# Allegro board BBB_CAPE_PCB_AN.brd
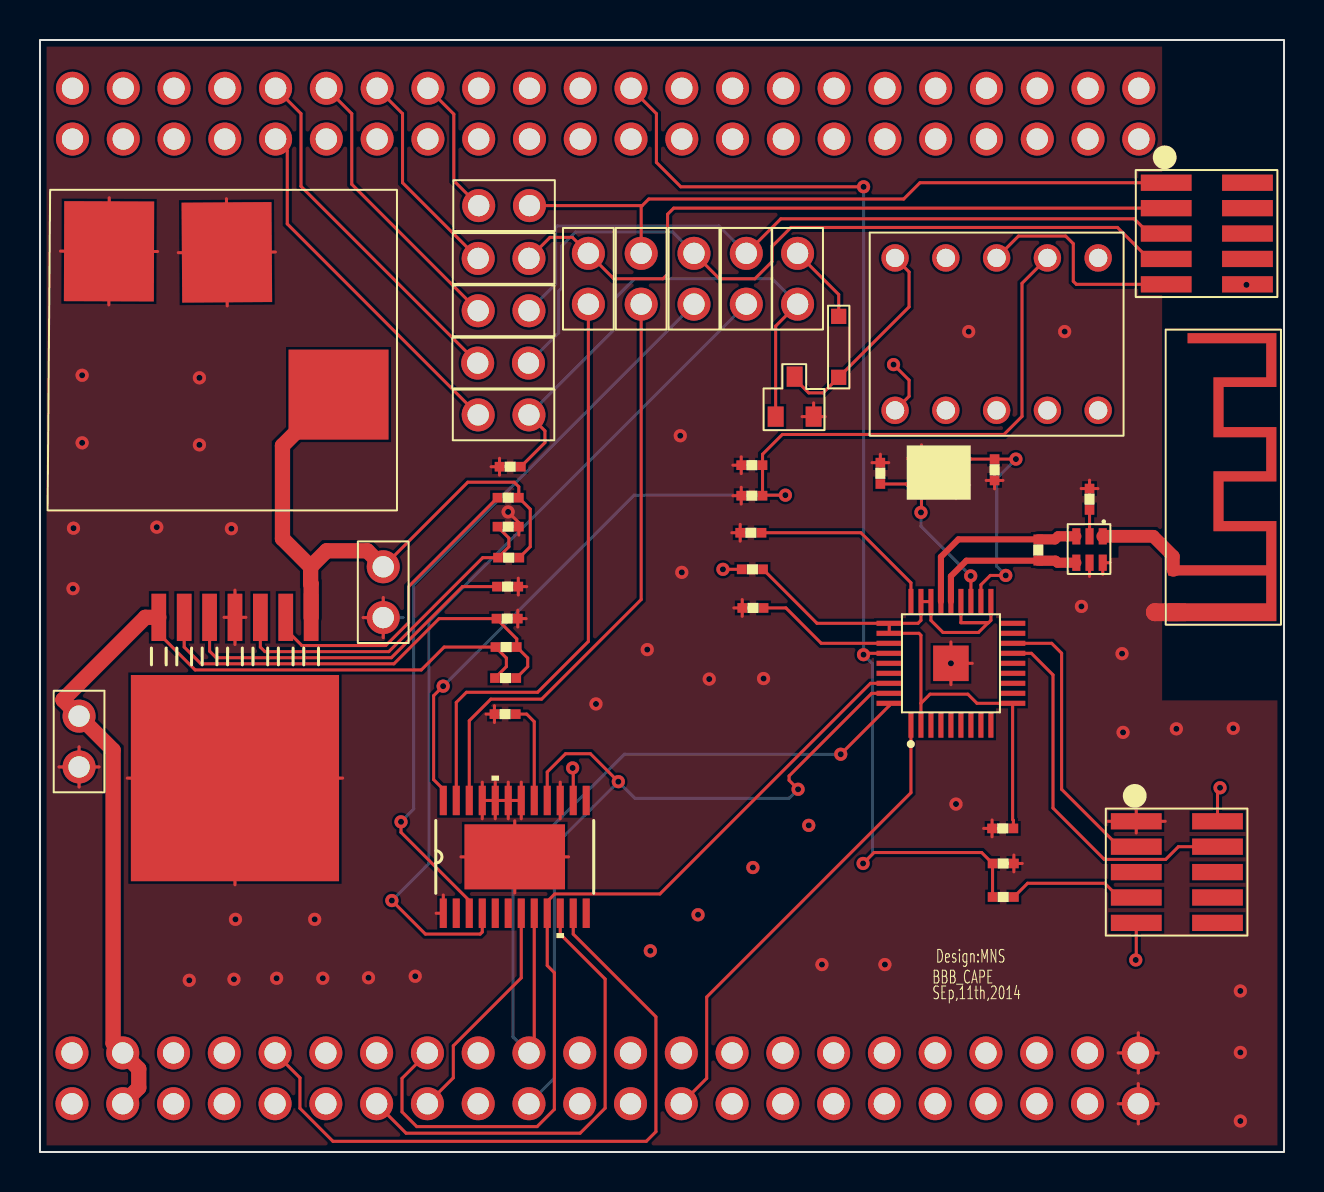
[diagram p0: board, top side]
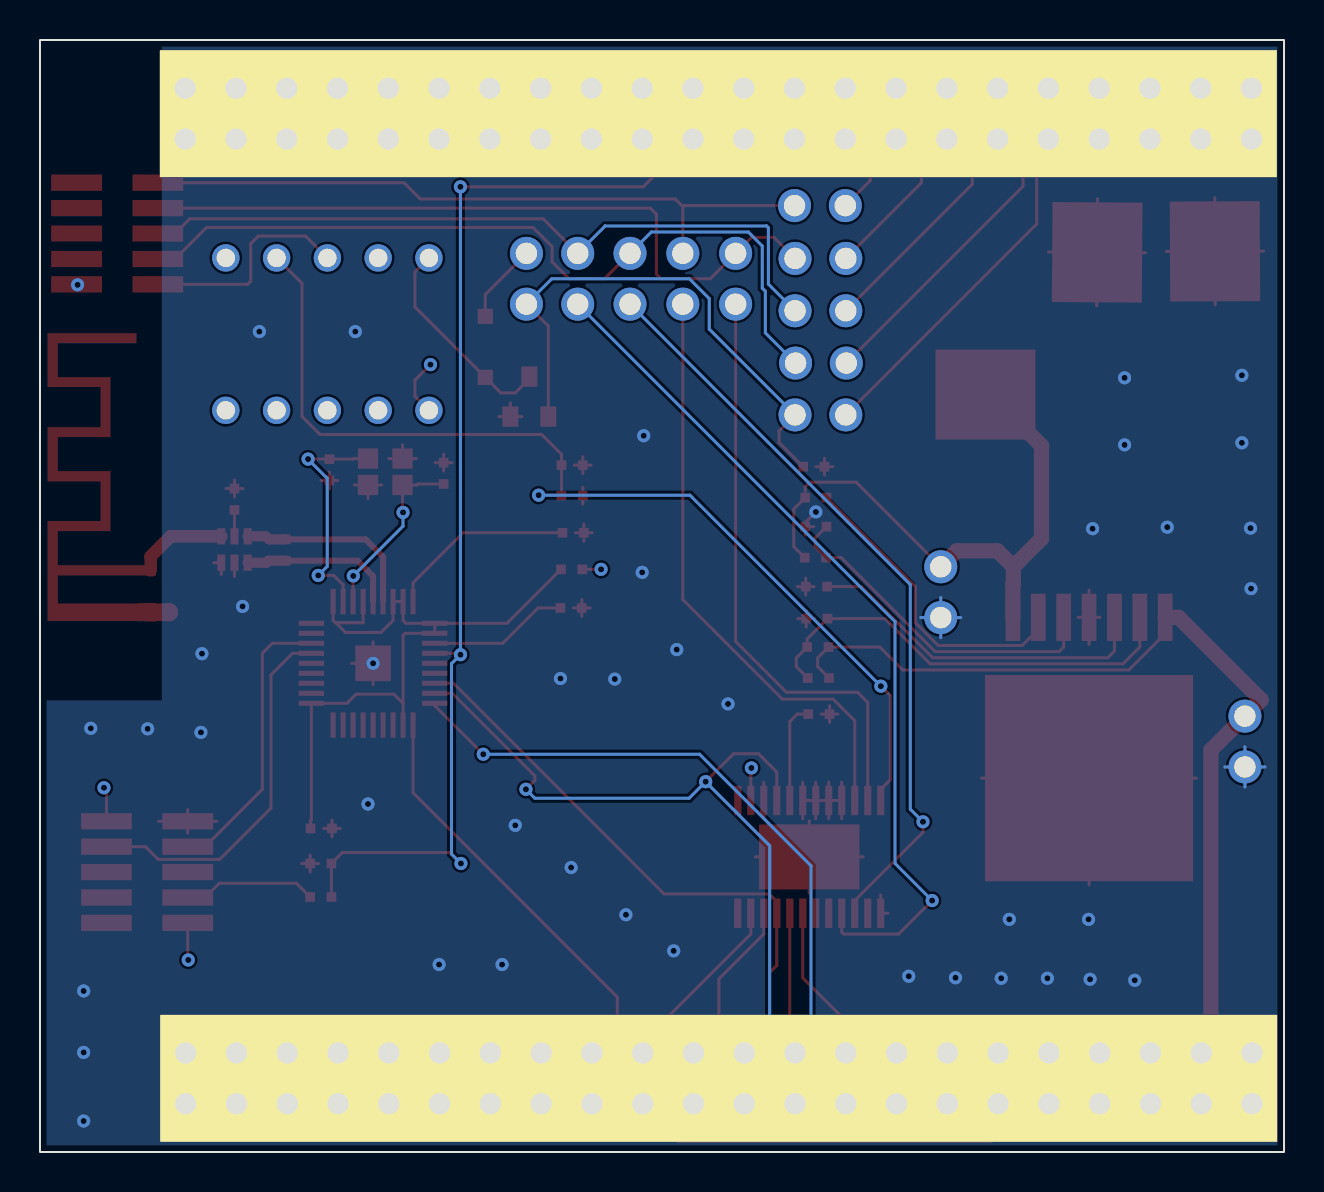
[diagram p1: board, bottom side, seen from below]

Outline 62.23 x 55.6 mm; copper layers: TOP, GND, MID, BOTTOM. Coordinates in mm from the lower left corner of the outline.
Outline path: rectangle 0,0 62.23,55.6

## Design rules (mm)
nets with their own width: min track width 0.152; nets +12V FWD GND L N11218387 N11218403 N11218459 N11218661 N11218877 N11218881 N11218885 N11218889 N11219535 N11219587 N11219669 N11219685 N11219949 N11219953 N11219965 N11219969 N11220291 N11220347 N11220383 N11220411 N11220631 N11220643 N11220647 NCLR NLDAC NSYNC R RESET_N RVR SPI_MISO SPI_MOSI SPI_NCS SPI_SCK VCC1 VCC3V VCC5V

## Placement (name value [footprint] x y rotation side)
C1  10uF  [JUMPER2]  15.9 30.53 270 top
C2  0.022uF  [C0402]  24.36 28.96 180 top
C3  100uF  [JUMPER2]  3.23 17.98 90 top
C4  0.022uF  [C0402]  22.35 24.56 0 top
C11  1uF  [C0402]  49.12 16.87 180 top
C12  1uF  [C0402]  36.63 27.89 180 top
C13  22pF  [C0402]  42.72 32.97 90 top
C14  22pF  [C0402]  47.07 35.08 270 top
C40  1nF  [C0402]  47.22 13.74 0 top
C41  10uF  [C0402]  36.58 35.03 180 top
C42  0.1uF  [C0402]  36.58 33.5 180 top
C45  100nF  [C0402]  22.3 21.21 0 top
C46  22pF  [C0402]  53.19 31.67 90 top
D1  MBR0520L  [DIODED]  40.49 38.18 90 top
H13  Header1X1  [ANT_W]  57.63 32.97 0 top
J2  CON5  [H5X2]  53.31 10.82 0 top
J3  CON5  [H5X2]  54.81 42.75 0 top
L1  10nH  [L0402]  50.27 29.24 90 top
L2  BEAD  [L0402]  34.77 28.8 0 top
Q2  DMN5L06K  [MOS_DMN]  36.19 36.09 0 top
R2  100k  [R0402]  24.28 33.05 180 top
R3  5.62k  [R0402]  24.16 24.03 180 top
R4  1.07k  [R0402]  22.5 26.34 0 top
R5  56k  [R0402]  36.42 31.29 180 top
R44  2.7k  [R0402]  49.05 13.08 180 top
R49  0  [JUMPER2]  33.99 41.12 90 top
R50  0  [JUMPER2]  36.6 41.12 90 top
R51  0  [JUMPER2]  28.7 41.12 90 top
R52  0  [JUMPER2]  31.34 41.12 90 top
R53  0  [JUMPER2]  20.62 38.18 0 top
R54  0  [JUMPER2]  20.65 40.79 0 top
R55  0  [JUMPER2]  20.65 43.41 0 top
R56  0  [JUMPER2]  20.68 46.05 0 top
R57  100k  [R0402]  22.66 33.93 0 top
R58  0  [JUMPER2]  20.65 35.59 0 top
R59  0  [JUMPER2]  39.17 41.12 90 top
RENB  11.8k  [R0402]  24.28 31.6 180 top
RENT  68.1k  [R0402]  22.58 29.39 0 top
U6  PJack  [PJ]  17.91 48.16 180 top
U7  1  [CC2510]  45.57 24.43 90 top
U9  connect22x2  [CONNECT22X2]  56.24 55.09 270 bottom
U10  connect22x2  [CONNECT22X2]  56.21 6.86 270 bottom
U11  Value  [AD5724]  23.75 14.76 90 top
U13  Value  [LMZ14203]  9.75 18.69 180 top
U14  relay  [MBR0520L]  41.5 35.81 0 top
U15  balunn  [BALUNN]  51.41 28.91 0 top
Y1  26MHz  [CRYST_26M]  43.31 32.46 0 top

## Library data of the parts
C1-C4 C11-C14 C40-C42 C45 = C
C46 = C: room: 1
D1 = 1N5814
H13 = Header1X1_0: room: 1
J2 J3 = CON5_0
L1 L2 = INDUCTOR
Q2 = DMN5L06K_0: room: 2
R2-R4 R49-R59 = R_0
R5 R44 RENB RENT = R
U6 = PJack_0
U7 = cc2510f32rspr_1
U9 U10 = connect22x2
U11 = AD5724AREZ
U13 = LMZ14203_NDW_7
U14 = relay
U15 = balunn
Y1 = CRYSTAL_2

## Footprints (pads in the part's own frame, mm; a bottom-side part is the same pattern mirrored in y, then rotated)
AD5724
  rect 1.473x0.356 smd: 1(-2.819,3.575) 2(-2.819,2.925) 3(-2.819,2.275) 4(-2.819,1.625) 5(-2.819,0.975) 6(-2.819,0.325) 7(-2.819,-0.325) 8(-2.819,-0.975) 9(-2.819,-1.625) 10(-2.819,-2.275) 11(-2.819,-2.925) 12(-2.819,-3.575) 13(2.819,-3.575) 14(2.819,-2.925) 15(2.819,-2.275) 16(2.819,-1.625) 17(2.819,-0.975) 18(2.819,-0.325) 19(2.819,0.325) 20(2.819,0.975) 21(2.819,1.625) 22(2.819,2.275) 23(2.819,2.925) 24(2.819,3.575)
  rect 3.251x5.029 smd: 25(0,0)
ANT_W
  rect 0.508x0.508 smd: 1(-0.94,-3.886)
  rect 0.889x0.889 smd: 2(-0.749,-5.982)
BALUNN
  rect 0.406x0.813 smd: 1(1.753,1.88) 2(1.092,1.88) 3(0.432,1.88) 4(0.432,0.559) 5(1.092,0.559) 6(1.753,0.559)
C0402
  rect 0.483x0.483 smd: 1(0.432,0.686) 2(1.499,0.686)
CC2510
  rect 1.27x0.254 smd: 1(-3.086,2) 2(-3.086,1.5) 3(-3.086,1) 4(-3.086,0.5) 5(-3.086,0) 6(-3.086,-0.5) 7(-3.086,-1) 8(-3.086,-1.5) 9(-3.086,-2) 19(3.086,-2) 20(3.086,-1.5) 21(3.086,-1) 22(3.086,-0.5) 23(3.086,0) 24(3.086,0.5) 25(3.086,1) 26(3.086,1.5) 27(3.086,2)
  rect 0.254x1.27 smd: 10(-2,-3.086) 11(-1.5,-3.086) 12(-1,-3.086) 13(-0.5,-3.086) 14(0,-3.086) 15(0.5,-3.086) 16(1,-3.086) 17(1.5,-3.086) 18(2,-3.086) 28(2,3.086) 29(1.5,3.086) 30(1,3.086) 31(0.5,3.086) 32(0,3.086) 33(-0.5,3.086) 34(-1,3.086) 35(-1.5,3.086) 36(-2,3.086)
  rect 1.778x1.778 smd: 37(0,0)
CONNECT22X2
  round 1.651 hole 1.067: 1(4.445,54.61) 2(1.905,54.61) 3(4.445,52.07) 4(1.905,52.07) 5(4.445,49.53) 6(1.905,49.53) 7(4.445,46.99) 8(1.905,46.99) 9(4.445,44.45) 10(1.905,44.45) 11(4.445,41.91) 12(1.905,41.91) 13(4.445,39.37) 14(1.905,39.37) 15(4.445,36.83) 16(1.905,36.83) 17(4.445,34.29) 18(1.905,34.29) 19(4.445,31.75) 20(1.905,31.75) 21(4.445,29.21) 22(1.905,29.21) 23(4.445,26.67) 24(1.905,26.67) 25(4.445,24.13) 26(1.905,24.13) 27(4.445,21.59) 28(1.905,21.59) 29(4.445,19.05) 30(1.905,19.05) 31(4.445,16.51) 32(1.905,16.51) 33(4.445,13.97) 34(1.905,13.97) 35(4.445,11.43) 36(1.905,11.43) 37(4.445,8.89) 38(1.905,8.89) 39(4.445,6.35) 40(1.905,6.35) 41(4.445,3.81) 42(1.905,3.81) 43(4.445,1.27) 44(1.905,1.27)
CRYST_26M
  rect 1.016x1.016 smd: 1(0.787,0.889) 2(2.515,2.21) 3(2.515,0.889) 4(0.787,2.21)
DIODED
  rect 0.762x0.762 smd: 1(0.559,0.533) 2(3.607,0.533)
H5X2
  rect 2.54x0.813 smd: 1(1.524,5.715) 2(5.588,5.715) 3(1.524,4.445) 4(5.588,4.445) 5(1.524,3.175) 6(5.588,3.175) 7(1.524,1.905) 8(5.588,1.905) 9(1.524,0.635) 10(5.588,0.635)
JUMPER2
  round 1.651 hole 1.067: 1(1.27,1.27) 2(3.81,1.27)
L0402
  rect 0.483x0.483 smd: 1(0.33,0.33) 2(1.397,0.33)
LMZ14203
  rect 0.737x2.362 smd: 1(-3.81,-8.039) 2(-2.54,-8.039) 3(-1.27,-8.039) 4(0,-8.039) 5(1.27,-8.039) 6(2.54,-8.039) 7(3.81,-8.039)
  rect 10.414x10.312 smd: 8(0,0)
MBR0520L
  round 1.372 hole 0.914: 1(1.27,1.27) 2(3.81,1.27) 3(6.35,1.27) 4(8.89,1.27) 5(11.43,1.27) 6(11.43,8.89) 7(8.89,8.89) 8(6.35,8.89) 9(3.81,8.89) 10(1.27,8.89)
MOS_DMN
  rect 0.8x1.016 smd: 1(0.605,0.676) 2(2.504,0.676) 3(1.554,2.676)
PJ
  rect 5x4.5 smd: 1(2.972,10.287)
  rect 5x4.5 smd rot 90.4: 2(8.56,3.175)
  rect 5x4.5 smd rot 89.8: 3(14.453,3.124)
R0402
  rect 0.483x0.483 smd: 1(0.33,0.33) 2(1.397,0.33)

## Nets
+12V: J3.9 U14.8
AVDD: C41.1 C42.1 U11.24(AVDD) U14.7
GND: C1.2 C2.1 C3.1 C11.2 C12.2 C13.2 C14.2 C40.2 C41.2 C42.2 C45.1 C46.2 H13.2 J2.1 J3.10 Q2.2(S) R4.2 R5.2 R57.1 RENB.1 U6.2(GND) U6.3 U7.37(GND EXPOSED) U10.43 U10.44 U11.1(AVSS) U11.15(GND) U11.18(DAC_GND_1) U11.19(DAC_GND) U11.20(SIG_GND_1) U11.21(SIG_GND) U11.25(AVSS_1) U13.4(GND) U13.8 U15.5(GND2) U15.6(GND3) Y1.3(GND#3) Y1.4(GND#4)
VCC1: C11.1 L2.2 U7.2(DVDD#2) U7.10(DVDD#10) U7.19(AVDD#19) U7.22(AVDD#22) U7.25(AVDD#25) U7.26(AVDD#26) U7.28(GUARD) U7.29(AVDD_DREG)
VCC3V: D1.2(K) J2.2 J2.9 L2.1 R59.2 U10.1 U10.2 U11.14(DVCC) U14.1
VCC5V: C3.2 C4.1 R3.2 U10.3 U10.4 U13.7(VOUT)
FWD: J3.7 R49.2 R53.2
L: J3.3 R51.2 R55.2
NCLR: U10.10 U11.11(CLR)
NLDAC: U10.13 U11.10(LDAC)
NSYNC: U10.15 U11.7(SYNC)
R: J3.1 R52.2 R56.2
RELAYIN: R58.1 U9.9
RESET_N: C40.1 R44.2 U7.31(RESET_N) U9.24
RVR: J3.5 R50.2 R54.2
SPI_MISO: U7.35(P1_4) U10.19 U11.16(SDO)
SPI_MOSI: U7.34(P1_5) U10.16 U11.9(SDIN)
SPI_NCS: U7.1(P1_2) U10.25
SPI_SCK: U7.36(P1_3) U10.20 U11.8(SCLK)
N11218387: C1.1 R2.1 RENT.2 U6.1(HOT) U13.1(VIN)
N11218403: R2.2 U13.2(RON)
N11218459: RENB.2 RENT.1 U13.3(EN)
N11218661: C4.2 R3.1 R4.1 U13.6(FB)
N11218877: R49.1 U11.3(VOUTA)
N11218881: R50.1 U11.4(VOUTB)
N11218885: R52.1 U11.22(VOUTD)
N11218889: R51.1 U11.23(VOUTC)
N11219009: Q2.1(G) R57.2 R58.2 R59.1
N11219235: D1.1(A) Q2.3(D) U14.10
N11219523: H13.1 U15.1(UBP)
N11219535: L1.1 U7.23(RF_P) U15.4(BP2)
N11219587: L1.2 U7.24(RF_N) U15.3(BP1)
N11219591: C46.1 U15.2(GND1)
N11219669: C45.2 U11.17(REFIN)
N11219685: C2.2 U13.5(SS)
N11219949: R53.1 U9.10
N11219953: R54.1 U9.12
N11219965: R55.1 U9.14
N11219969: R56.1 U9.16
N11220291: C12.1 U7.30(DCOUPL)
N11220347: R5.1 U7.27(RBIAS)
N11220383: C13.1 U7.21(XOSC_Q1) Y1.1
N11220411: C14.1 U7.20(XOSC_Q2) Y1.2
N11220631: J2.7 R44.1
N11220643: J2.3 U7.16(P2_2)
N11220647: J2.4 U7.15(P2_1)

Pads without a net: J2 5 6 8 10; J3 2 4 6 8; U7 3 4 5 6 7 8 9 11 12 13 14 17 18 32 33; U9 1 2 3 4 5 6 7 8 11 13 15 17 18 19 20 21 22 23 25 26 27 28 29 30 31 32 33 34 35 36 37 38 39 40 41 42 43 44; U10 5 6 7 8 9 11 12 14 17 18 21 22 23 24 26 27 28 29 30 31 32 33 34 35 36 37 38 39 40 41 42; U11 2 5 6 12 13; U14 2 3 4 5 6 9

## Via types
v1: diameter 0.66, hole 0.305, TOP to BOTTOM, 61 vias

## Routing (per net, layer and track width the routed paths; a pad name or vN(x,y) marks a point on that pad's centre or on a via; arc(x,y) is an arc through that point)
+12V: length 11
  TOP w0.152: J3.9 51.84,43.38 51.69,43.54 51.69,45.42 51.31,45.8 48.95,45.8 U14.8
AVDD: length 52.6
  TOP w0.152: 36.14,32.84 C41.1 36.14,34.89 37.13,35.88 48.22,35.88 49.12,36.78 49.12,43.43 U14.7 ; 36.14,32.84 v1(37.29,32.84) ; 36.14,32.84 C42.1 ; U11.24 20.17,18.14 19.69,18.62 19.69,22.82 v1(20.17,23.29)
  BOTTOM w0.152: v1(20.17,23.29) 29.72,32.84 v1(37.29,32.84)
GND: length 151.2
  TOP w0.152: U13.4 9.75,28.09 ; U13.4 9.21,26.73 ; U13.4 9.75,25.37 ; U13.4 10.3,26.73 ; U11.20 U11.19 ; U11.20 22.77,18.49 ; U11.20 22.77,16.66 ; U11.20 U11.21 ; U11.19 23.42,18.49 ; U11.19 U11.18 ; U11.19 23.42,16.66 ; J2.1 56.29,16.54 ; J2.1 53.39,16.54 ; J2.1 54.84,17.12 ; J2.1 54.84,15.95 ; 23.48,26.67 R4.2 ; R4.2 23.9,26.25 ; R4.2 23.9,27.09 ; R4.2 24.32,26.67 ; U6.2 9.37,42.3 ; U6.2 6.92,44.97 ; U6.2 9.33,47.66 ; U6.2 11.78,45 ; 22.12,16.66 U11.21 ; U11.21 22.12,18.49 ; 34.61,30.96 R5.2 ; R5.2 35.03,31.38 ; R5.2 35.45,30.96 ; R5.2 35.03,30.54 ; C12.2 35.55,27.2 ; C12.2 34.71,27.2 ; C12.2 35.13,26.78 ; C12.2 35.13,27.62 ; C3.1 2.96,19.25 ; C3.1 0.95,19.25 ; C3.1 1.96,18.25 ; C3.1 1.96,20.26 ; 22.31,21.89 C45.1 ; C45.1 22.73,21.48 ; C45.1 23.15,21.89 ; C45.1 22.73,22.31 ; R57.1 23.41,34.26 ; R57.1 22.99,33.84 ; R57.1 22.57,34.26 ; R57.1 22.99,34.68 ; 41.62,34.47 C13.2 ; C13.2 42.04,34.05 ; C13.2 42.04,34.89 ; C13.2 42.46,34.47 ; C42.2 35.08,33.24 ; C42.2 35.5,32.82 ; C42.2 34.66,32.82 ; C42.2 35.08,32.4 ; 52.08,33.17 C46.2 ; C46.2 52.5,32.75 ; C46.2 52.5,33.59 ; C46.2 52.92,33.17 ; Y1.4 44.78,34.67 ; Y1.4 44.09,35.36 ; Y1.4 43.41,34.67 ; U10.43 55.94,2.41 ; U10.43 54.94,3.42 ; U10.43 53.94,2.41 ; U10.43 54.94,1.41 ; 23.53,31.27 RENB.1 ; RENB.1 23.95,31.47 v1(23.42,32) ; RENB.1 23.95,30.85 ; 53.16,28.88 U15.6 53.54,29.46 ; C14.2 48.17,33.58 ; C14.2 47.33,33.58 ; C14.2 47.75,34 ; C14.2 47.75,33.16 ; 47.62,15.76 C11.2 ; C11.2 47.21,16.18 ; C11.2 48.04,16.18 ; C11.2 47.62,16.6 ; 23.93,27.85 C2.1 ; C2.1 23.93,28.69 ; C2.1 23.51,28.27 ; C2.1 24.35,28.27 ; 21.06,14.76 U11.25 ; U11.25 23.75,16.56 ; U11.25 26.44,14.76 ; U11.25 23.75,12.95 ; U6.3 5.88,45.03 ; U6.3 1.03,45.04 ; U6.3 3.44,42.36 ; U6.3 3.46,47.71 ; 38.12,36.77 Q2.2 ; Q2.2 39.28,36.77 ; Q2.2 38.7,37.46 ; U13.8 15.14,18.69 ; U13.8 4.37,18.69 ; U13.8 9.75,13.36 ; v1(45.57,24.43) 45.57,25.5 ; v1(45.57,24.43) 45.54,24.43 ; v1(45.57,24.43) 46.63,24.43 ; v1(45.57,24.43) 45.57,23.37 ; 48.72,14.01 C40.2 ; C40.2 48.3,14.43 ; C40.2 48.72,14.85 ; C40.2 49.14,14.43 ; 20.17,12.85 U11.1 19.82,11.94 ; U10.44 54.94,5.96 ; U10.44 53.94,4.95 ; U10.44 55.94,4.95 ; U10.44 54.94,3.95 ; 26.02,16.66 U11.15 26.02,18.49 ; 24.07,16.66 U11.18 ; U11.18 24.07,18.49 ; C41.2 35.5,34.34 ; C41.2 35.08,34.76 ; C41.2 34.66,34.34 ; C41.2 35.08,33.92 ; 45.82,32.66 Y1.3 ; Y1.3 46.51,33.35 ; Y1.3 45.14,33.35 ; C1.2 17.17,27.72 ; C1.2 17.17,25.72 ; C1.2 16.17,26.72 ; U15.5 52.5,28.78
  TOP w0.889: 55.78,27 55.77,26.99 55.77,26.99 H13.2
  GND w0.152: 17.17,25.84 C1.2 ; C1.2 17.17,27.6 ; C1.2 16.29,26.72 ; C1.2 18.05,26.72 ; 54.94,4.08 U10.44 ; U10.44 54.06,4.95 ; U10.44 54.94,5.83 ; U10.44 55.82,4.95 ; C3.1 2.83,19.25 ; C3.1 1.08,19.25 ; C3.1 1.96,20.13 ; C3.1 1.96,18.38 ; 54.06,2.41 U10.43 ; U10.43 54.94,3.29 ; U10.43 54.94,1.54 ; U10.43 55.82,2.41 ; v1(60.35,43.36) 55.83,43.36 55.68,43.21
  BOTTOM w0.152: U10.44 55.94,4.95 ; U10.44 53.94,4.95 ; U10.44 54.94,3.95 ; U10.44 54.94,5.96 ; U10.43 55.94,2.41 ; U10.43 54.94,1.41 ; U10.43 54.94,3.42 ; U10.43 53.94,2.41 ; 0.95,19.25 C3.1 ; C3.1 2.96,19.25 ; C3.1 1.96,18.25 ; C3.1 1.96,20.26 ; 17.17,25.72 C1.2 ; C1.2 18.17,26.72 ; C1.2 17.17,27.72 ; C1.2 16.17,26.72
  vias: v1(1.68,31.19) v1(1.65,28.17) v1(2.11,38.84) v1(2.11,35.46) v1(5.84,31.24) v1(7.47,8.59) v1(7.98,38.71) v1(7.98,35.36) v1(9.58,31.17) v1(9.7,8.64) v1(9.78,11.63) v1(11.84,8.69) v1(13.74,11.63) v1(14.15,8.69) v1(16.43,8.71) v1(18.77,8.79) v1(27.81,22.4) v1(30.38,25.12) v1(30.53,10.06) v1(32.03,35.81) v1(32.11,28.98) v1(32.92,11.86) v1(33.48,23.65) v1(35.66,14.22) v1(36.19,23.67) v1(38.46,16.33) v1(39.12,9.37) v1(42.27,9.37) v1(45.82,17.4) v1(46.46,41.02) v1(51.26,41.02) v1(52.1,27.28) v1(54.13,24.92) v1(54.18,20.98) v1(56.85,21.16) v1(59.69,21.18) v1(60.05,8.05) v1(60.05,4.98) v1(60.05,1.55)
VCC1: length 37.5
  TOP w0.152: C11.1 48.69,16.59 48.65,16.62 U7.10 46.87,22.43 46.41,22.89 44.52,22.89 44.07,22.43 ; U7.22 46.07,26.47 ; 46.07,26.47 47.43,26.47 46.95,25.98 45.17,25.98 44.57,26.58 U7.25 U7.26 44.07,26.58 43.92,26.43 U7.28 ; 46.07,26.47 47.45,26.47 47.57,26.58 U7.19 ; U7.28 38.87,26.43 L2.2 ; U7.28 U7.29 43.97,25.93 44.07,25.84 44.07,22.43 ; 44.07,22.43 U7.2
VCC3V: length 23.6
  TOP w0.152: U14.1 43.47,37.78 43.47,38.59 v1(42.7,39.37) ; U11.14 26.67,19.17 v1(26.64,19.2) ; R59.2 39.95,42.88 D1.2 ; v1(59.03,18.21) 58.9,18.08 J2.2 ; v1(34.16,29.13) L2.1 ; J2.9 54.84,9.63 v1(54.81,9.6)
  MID w0.152: R59.2 38.77,44.93 ; R59.2 37.02,44.93 ; R59.2 37.9,44.06 ; R59.2 37.9,45.81 ; 0.72,4.95 U10.2 ; U10.2 1.6,4.08 ; U10.2 1.6,5.83 ; U10.2 2.48,4.95 ; 1.6,1.54 U10.1 ; U10.1 2.48,2.41 ; U10.1 0.72,2.41 ; U10.1 1.6,3.29
VCC5V: length 49.5
  TOP w0.152: R3.2 23.33,24.27 23.33,24.7 22.78,25.25 20.22,25.25 19.08,24.1 7.76,24.1 5.94,25.92 U13.7
  TOP w0.762: U10.3 4.94,3.21 4.94,4.15 U10.4 3.66,5.44 3.66,20.09 C3.2 1.16,22.59 1.16,22.62 5.27,26.73 U13.7
FWD: length 40.2
  TOP w0.152: R49.2 33.99,43.66 35.76,43.66 36.61,44.51 36.61,45.28 37.57,46.23 53.9,46.23 55.47,44.65 J3.7
  BOTTOM w0.152: R49.2 31.65,46 26.8,46 26.1,45.3 26.1,43.19 25.95,43.04 25.95,40.96 R53.2
L: length 36.4
  TOP w0.152: R55.2 25.51,45.73 26.63,45.73 R51.2 28.7,43.66 31.17,43.66 31.39,43.89 31.39,46.89 31.7,47.19 J3.3
NCLR: length 34.6
  TOP w0.152: U10.10 13,3.71 13,2.18 14.66,0.53 30.33,0.53 30.81,1.02 30.81,6.76 26.67,10.9 U11.11
NLDAC: length 23.2
  TOP w0.152: U10.13 18.31,0.94 27.02,0.94 28.27,2.19 28.27,8.65 26.02,10.9 U11.10
NSYNC: length 11.5
  TOP w0.152: U11.7 24.07,8.71 20.68,5.31 20.68,3.71 U10.15
R: length 34.7
  TOP w0.152: R52.2 30.07,47.32 ; 30.07,47.32 30.12,47.32 30.45,47.65 43.21,47.65 44.02,48.46 J3.1 ; 30.07,47.32 R56.2
RELAYIN: length 18
  TOP w0.152: U9.9 12.37,50.06 12.37,46.41 R58.1
RESET_N: length 59.2
  TOP w0.152: R44.2 C40.1 47.1,14.97 41.72,14.97 v1(41.17,14.43) ; v1(41.2,24.87) 41.26,24.93 U7.31 ; v1(41.2,48.26) 32.05,48.26 30.84,49.48 30.84,51.92 U9.24
  BOTTOM w0.152: v1(41.2,48.26) 41.2,24.87 v1(41.2,24.87) 41.64,24.42 41.64,14.9 v1(41.17,14.43)
RVR: length 36.9
  TOP w0.152: R50.2 37.06,46.66 54.74,46.66 55.47,45.92 J3.5
  BOTTOM w0.152: R54.2 25.79,43.4 25.79,46.22 25.88,46.3 33.96,46.3 R50.2
SPI_MISO: length 41
  TOP w0.152: v1(28.93,18.52) 27.53,19.91 26.29,19.91 25.37,19 U11.16 ; U7.35 41.6,22.93 37.47,18.8 37.47,18.58 v1(37.92,18.14)
  BOTTOM w0.152: v1(37.92,18.14) 37.47,17.69 29.76,17.69 v1(28.93,18.52) 25.73,15.32 25.73,3.68 U10.19
SPI_MOSI: length 43.9
  TOP w0.152: U10.16 18.11,3.68 18.11,2.01 18.85,1.27 24.87,1.27 25.73,2.13 25.73,8.97 25.37,9.32 U11.9 25.37,12.53 25.75,12.9 31.01,12.9 41.54,23.43 U7.34
SPI_NCS: length 23.7
  TOP w0.152: U7.1 43.57,17.96 33.35,7.75 33.35,3.68 U10.25
SPI_SCK: length 39
  TOP w0.152: U11.8 24.72,5.22 U10.20 ; v1(40.06,19.89) 42.48,22.31 U7.36
  BOTTOM w0.152: v1(40.06,19.89) 29.24,19.89 23.66,14.31 23.66,5.75 U10.20
N11218387: length 30
  TOP w0.152: RENT.2 24.52,30.26 24.52,32.14 R2.1 23.95,33.26 23.72,33.49 21.4,33.49 C1.1
  TOP w0.762: 13.54,29.26 13.54,28.42 13.56,28.4 U13.1 ; 13.54,29.26 12.13,30.67 12.13,35.32 14.69,37.87 U6.1 ; 13.54,29.26 14.34,30.06 16.37,30.06 C1.1
N11218403: length 15.6
  TOP w0.152: R2.2 18.44,28.27 18.44,26.47 17.3,25.32 13.1,25.32 12.29,26.13 U13.2
N11218459: length 17.4
  TOP w0.152: U13.3 11.02,25.25 11.25,25.02 17.45,25.02 22.15,29.72 RENT.1 23.46,30.26 23.46,30.7 RENB.2
N11218661: length 22.2
  TOP w0.152: R3.1 24.4,24.27 24.4,24.7 23.85,25.25 23.85,25.65 R4.1 19.96,26.67 17.7,24.41 8.05,24.41 7.21,25.25 U13.6
N11218877: length 37.9
  TOP w0.152: U11.3 21.47,12.57 18.06,15.98 v1(18.06,16.51)
  BOTTOM w0.152: R49.1 18.69,28.37 18.69,17.14 v1(18.06,16.51)
N11218881: length 43.4
  TOP w0.152: v1(17.6,12.57) 19.28,10.9 22.02,10.9 22.12,11 U11.4
  BOTTOM w0.152: v1(17.6,12.57) 19.46,14.43 19.46,26.52 R50.1
N11218885: length 29.9
  TOP w0.152: U11.22 21.47,21.56 22.55,22.64 25.09,22.64 30.07,27.62 R52.1
N11218889: length 29.6
  TOP w0.152: R51.1 27.43,25.53 24.89,22.99 21.33,22.99 20.82,22.48 U11.23
N11219009: length 27.2
  TOP w0.152: R59.1 36.8,41.3 Q2.1 ; R58.2 25.26,36.06 25.26,35.47 R57.2
  BOTTOM w0.152: R58.2 28.75,41.15 28.75,42.67 29.74,43.66 36.63,43.66 R59.1
N11219235: length 10.6
  TOP w0.152: Q2.3 37.75,38.66 38.45,37.96 39.18,37.96 D1.1 43.47,42.26 43.47,44 U14.10
N11219523: length 4.6
  TOP w0.635: U15.1 55.69,30.78 56.69,29.78 H13.1
N11219535: length 7.9
  TOP w0.305: L1.1 46.34,29.57 45.57,28.79 U7.23
  TOP w0.508: L1.1 50.8,29.57 50.9,29.46 U15.4
N11219587: length 9.4
  TOP w0.305: U7.24 45.07,29.76 45.94,30.63 L1.2
  TOP w0.508: U15.3 50.93,30.78 50.77,30.63 L1.2
N11219591: length 1.3
  TOP w0.152: U15.2 C46.1
N11219669: length 5
  TOP w0.152: C45.2 24.35,21.89 24.72,21.52 U11.17
N11219685: length 17.7
  TOP w0.152: C2.2 21.13,28.27 17.58,24.71 8.81,24.71 8.48,25.04 U13.5
N11219949: length 17.9
  TOP w0.152: U9.10 13.06,51.92 13.06,48.29 R53.1
N11219953: length 14.3
  TOP w0.152: U9.12 15.6,51.92 15.6,48.39 R54.1
N11219965: length 10.6
  TOP w0.152: U9.14 18.14,51.92 18.14,48.46 R55.1
N11219969: length 6.9
  TOP w0.152: R56.1 20.7,48.56 20.7,51.89 U9.16
N11220291: length 7
  TOP w0.152: U7.30 39.08,25.43 37.31,27.2 C12.1
N11220347: length 9.5
  TOP w0.152: U7.27 43.57,28.46 41.07,30.96 R5.1
N11220383: length 9
  TOP w0.152: v1(44.07,31.98) 44.09,32 Y1.1 43.38,33.35 43.33,33.4 C13.1 ; U7.21 46.57,28.79 v1(46.56,28.8)
  BOTTOM w0.152: v1(46.56,28.8) 44.07,31.29 v1(44.07,31.98)
N11220411: length 11.7
  TOP w0.152: v1(48.82,34.65) C14.1 46.56,34.65 46.53,34.67 Y1.2 ; v1(48.31,28.83) 47.54,28.83 47.07,28.36 U7.20
  BOTTOM w0.152: v1(48.82,34.65) 47.86,33.69 47.86,29.28 v1(48.31,28.83)
N11220631: length 6.7
  TOP w0.152: R44.1 49.4,13.44 53.26,13.44 53.97,12.73 J2.7
N11220643: length 14.4
  TOP w0.152: J2.3 53.97,15.27 51.1,18.14 51.1,24.94 50.61,25.43 U7.16
N11220647: length 18.7
  TOP w0.152: J2.4 56.95,15.27 56.31,14.63 53.24,14.63 50.67,17.2 50.67,23.86 49.59,24.93 U7.15

## Copper pours and planes (outline as drawn; the poured copper is in the pictures)
GND on TOP: 0.33,55.27 0.33,0.33 61.9,0.33 61.9,22.58 56.13,22.58 56.13,55.27 ; 23 cut-outs
GND on BOTTOM: 0.33,55.27 0.33,0.33 61.9,0.33 61.9,22.58 56.13,22.58 56.13,55.27 ; 3 cut-outs
GND on GND: 0.33,0.33 0.33,55.27 56.13,55.27 56.13,22.58 61.9,22.58 61.9,0.33
VCC3V on MID: 0.33,0.33 0.33,55.27 56.13,55.27 56.13,22.58 61.9,22.58 61.9,0.33
N11219523 on TOP (solid shape): 61.85,38.25 59.21,38.25 59.21,36.25 61.85,36.25 61.85,33.53 59.21,33.53 59.21,31.55 61.85,31.55 61.85,26.54 56.44,26.54 56.44,27.43 61.34,27.43 61.34,28.83 56.44,28.83 56.44,29.34 61.34,29.34 61.34,31.04 58.7,31.04 58.7,34.04 61.34,34.04 61.34,35.74 58.7,35.74 58.7,38.73 61.34,38.73 61.34,40.44 57.4,40.44 57.4,40.94 61.85,40.94

## Text on the board
Ref Des/Silkscreen Top: BBB_CAPE | SEp,11th,2014 | Design:MNS
